# Altium PCB IGBT_half_bridge.PcbDoc
Units mil, origin at the board's own origin, x right, y up, seen from the top; angles counter-clockwise.
Board outline 3937.01 x 3543.31 mil, 2 copper layers (Top Layer, Bottom Layer), stack 61.855 mil thick; 43 components, 13 nets, 144 pads, 367 vias.
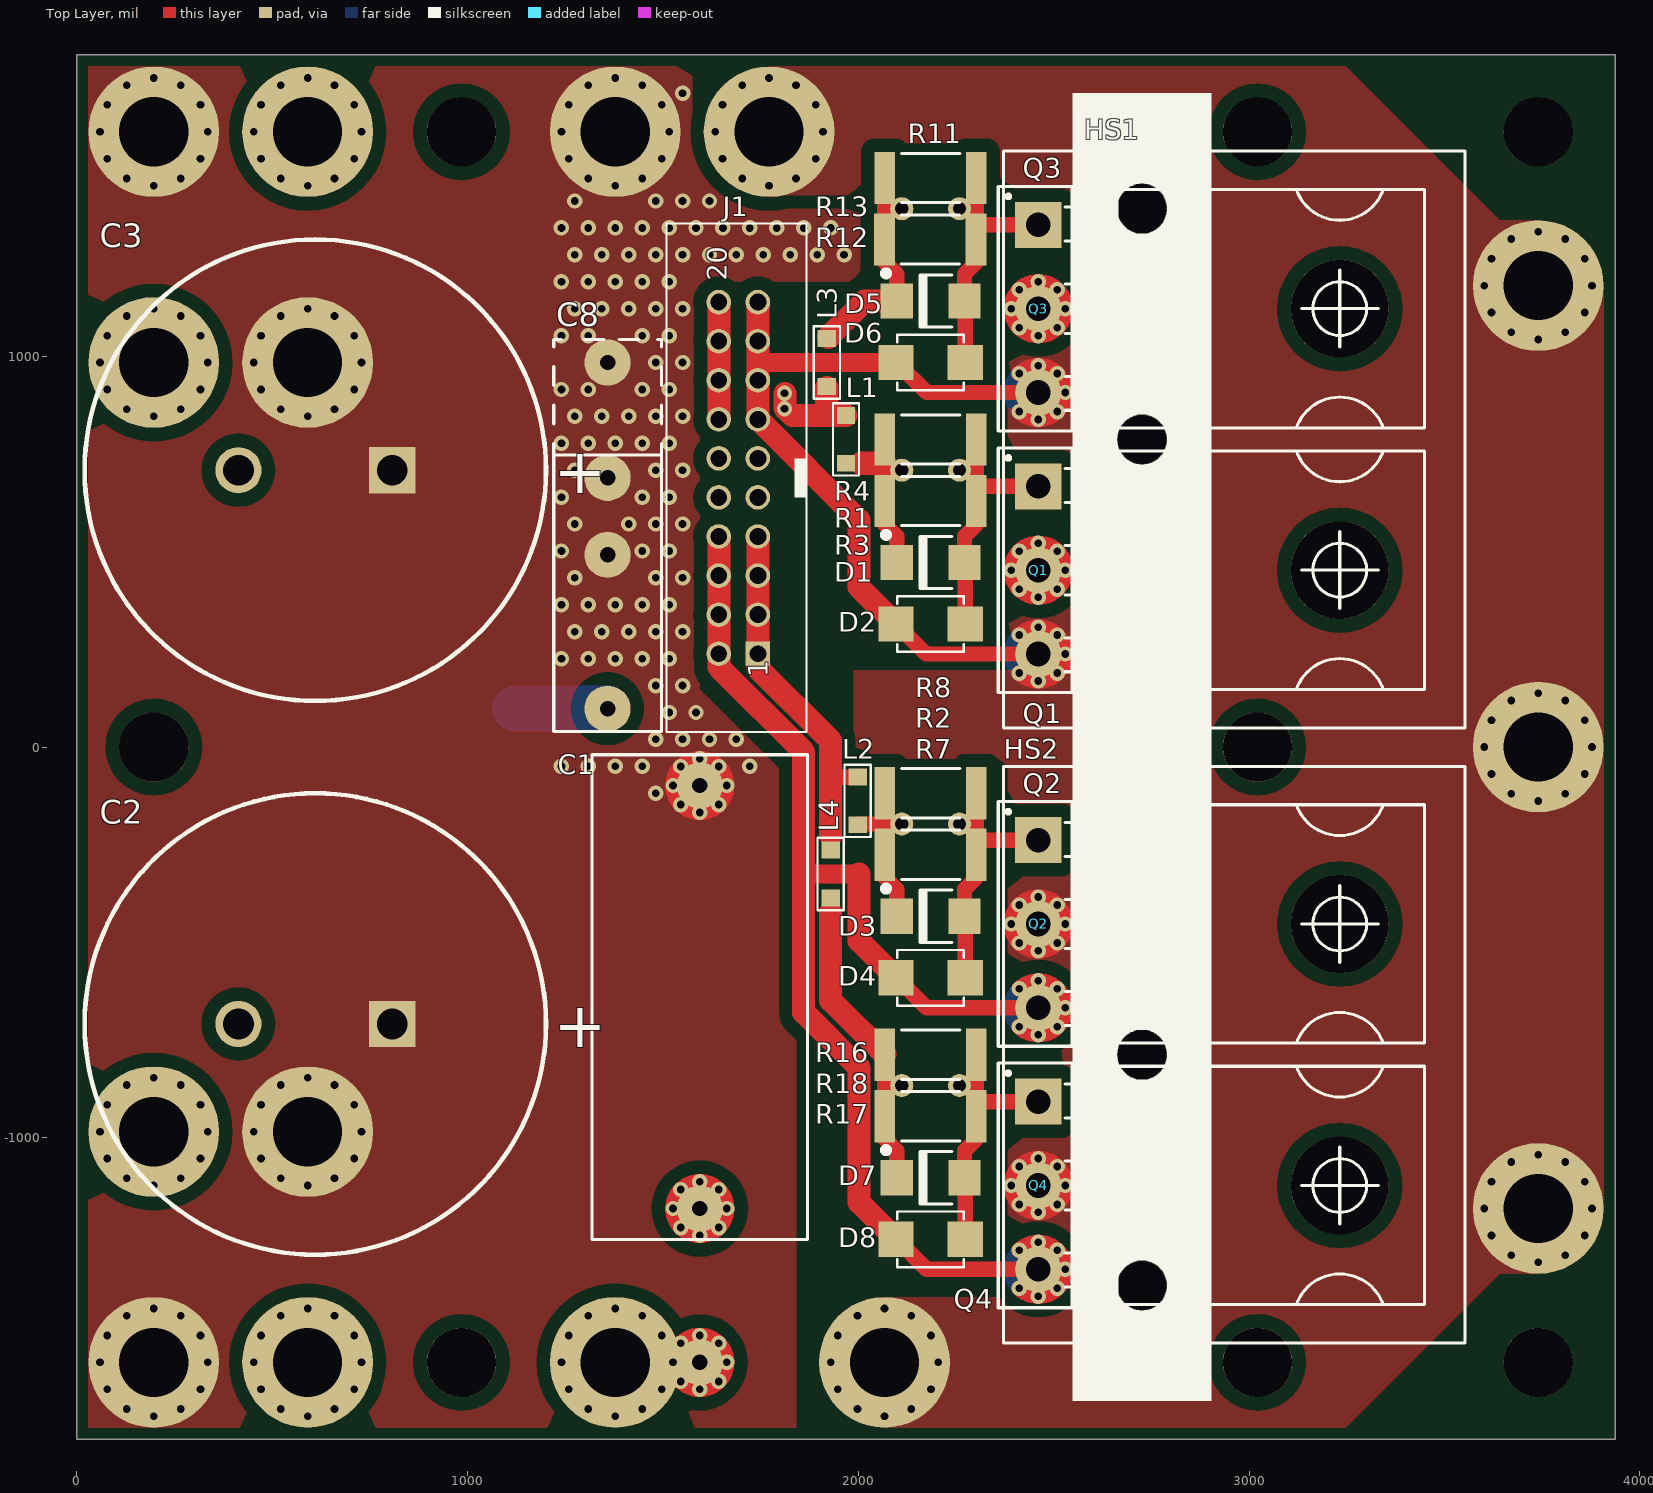
[diagram p0: Top Layer view]
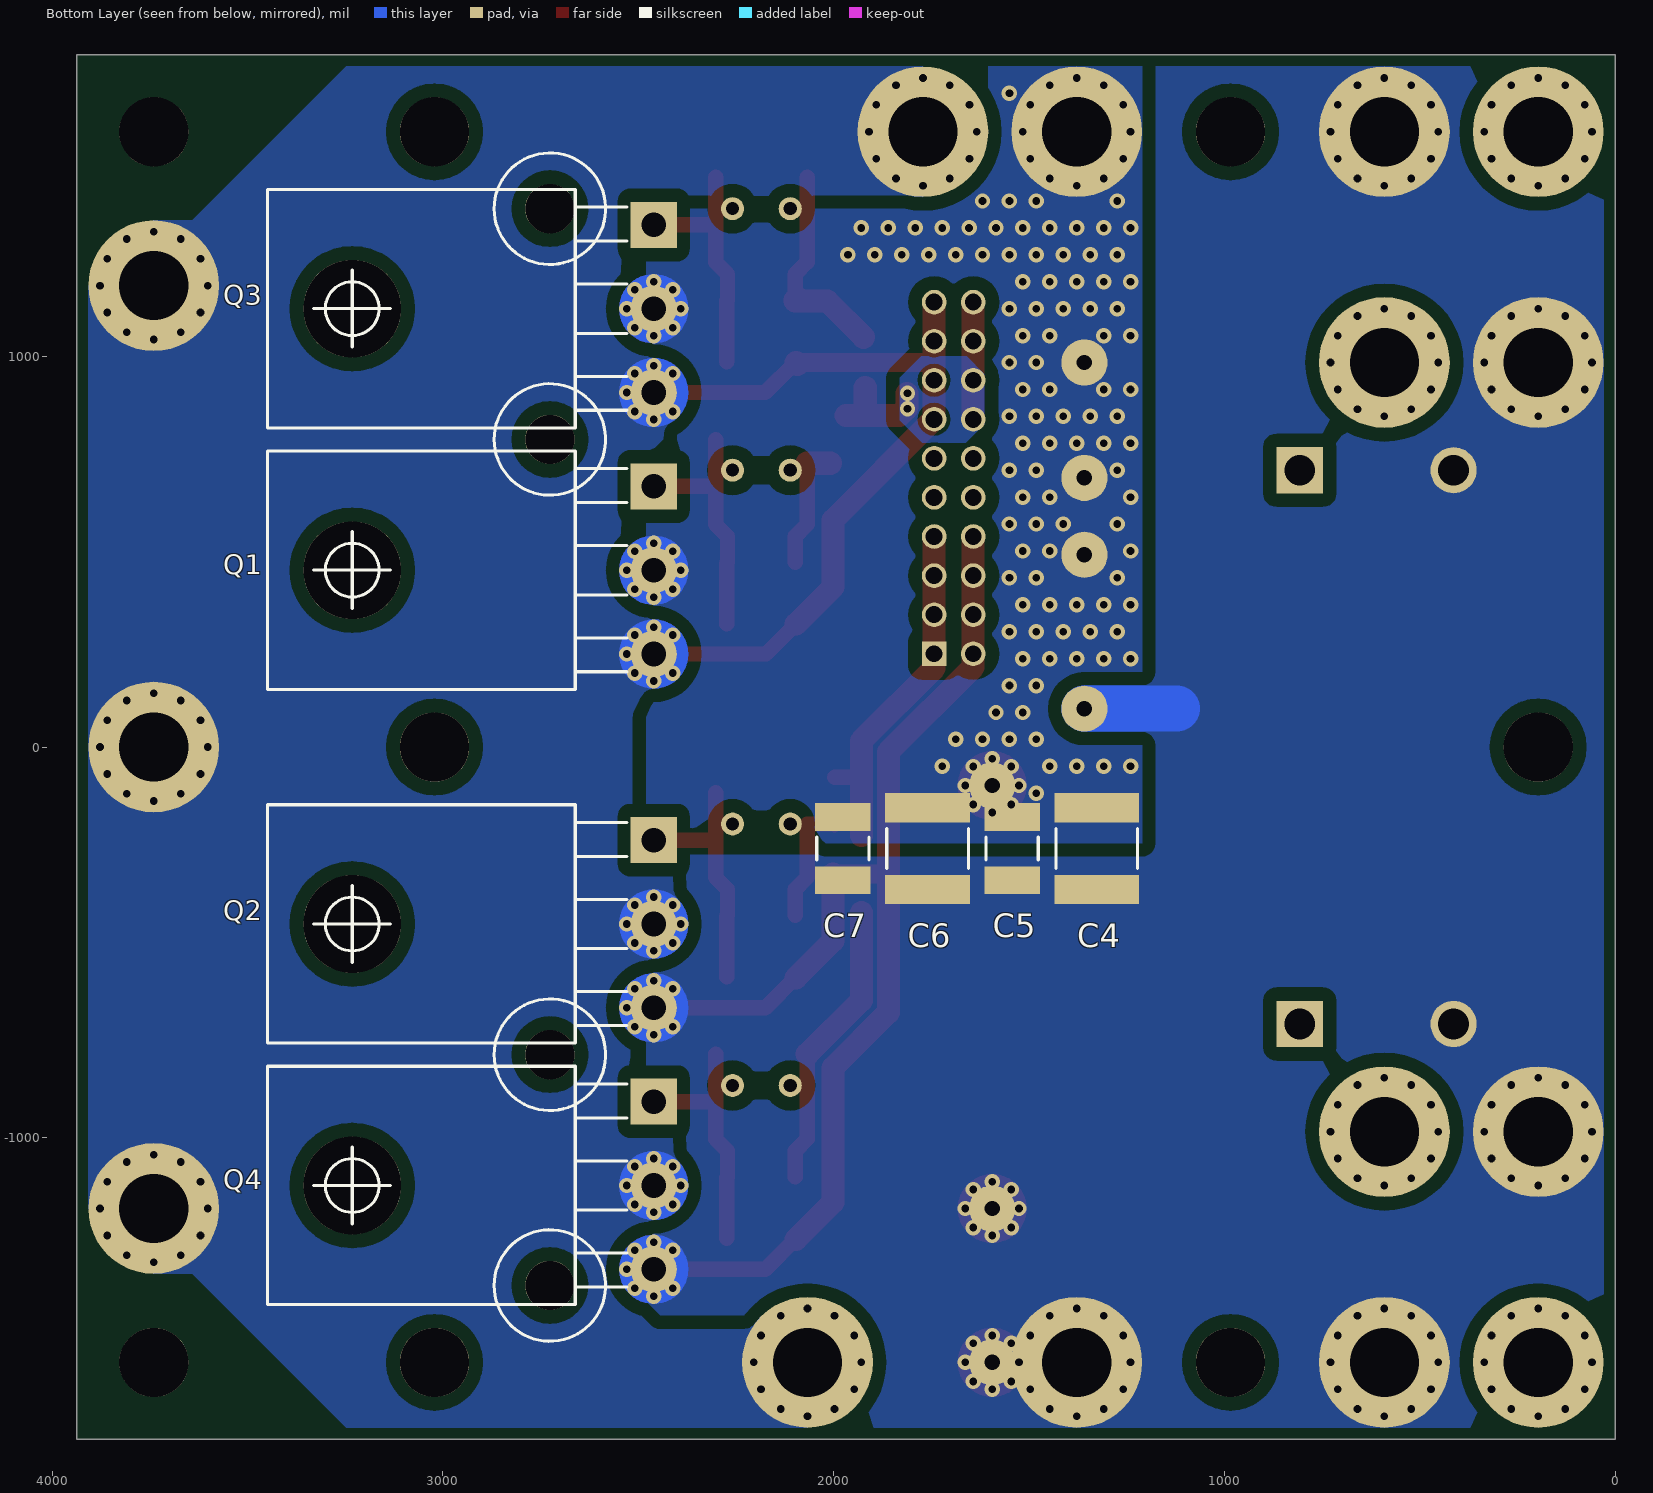
[diagram p1: Bottom Layer view, seen from below]

## Layer stack, top to bottom
Top Solder: solder mask 0.4, Solder Resist, Dk 3.5
Top Layer: signal copper 1.4
Dielectric 1: dielectric 59.0551, FR-4, Dk 4.8
Bottom Layer: signal copper 1.4
Bottom Solder: solder mask 0.4, Solder Resist, Dk 3.5

## Board outline
0,-1771.65 0,1771.65 3937.01,1771.65 3937.01,-1771.65

## Design rules (kind name [scope] priority, off if disabled: settings)
Clearance Clearance_poly [InPolygon and not InNet(High_G)] p1: gap=34.45 ignorepadtopadclearanceinfootprint=FALSE
Clearance [All] p2: gap=10 ignorepadtopadclearanceinfootprint=FALSE
ComponentClearance [All] p1 off: gap=10 collisioncheckmode=3 verticalgap=10 showdistances=FALSE
Height [All] p1 off: minheight=0 maxheight=1000 prefheight=500
HoleSize [All] p1: absolutevalues=TRUE maxlimit=250 minlimit=1 maxpercent=80.000 minpercent=20.000
PolygonConnect [All] p1: connectstyle=Direct reliefconductorwidth=10 reliefentries=4 polygonreliefangle="90 Angle" airgapwidth=10
RoutingVias [All] p1: holewidth=19.68 width=39.37 viastyle="Through Hole" minholewidth=19.68 minwidth=39.37 maxholewidth=19.68 maxwidth=39.37
SolderMaskExpansion [All] p1: expansion=4
Width [All] p1: maxlimit=393.7 minlimit=9.84 preferedwidth=19.68
27 further rules are at their usual default settings.

## Classes and differential pairs
component class IGBT_half_bridge: C1 C2 C3 C4 C5 C6 C7 C8 C41 D1 D2 D3 D4 D5 D6 D7 D8 HS1 HS2 J1 L1 L2 L3 L4 Q1 Q2 Q3 Q4 R1 R2 R3 R4 R7 R8 R11 R12 R13 R16 R17 R18

## Components (designator, comment, footprint, x,y, rotation, side; value= is the part's Value field where it differs from the comment)
C1 "B32774" "B32774 5uF 800V" 1594.49,-639.76 r270 top value="5uF 800V"
C2 "390uF" WCAP-AIG8_30x46 610.24,-708.66 r0 top
C3 "390uF" WCAP-AIG8_30x46 610.24,708.66 r0 top
C4 "Capacitor" 2220C 1326.77,-259.84 r270 bottom
C5 "Capacitor" 1812C 1543.31,-259.84 r270 bottom
C6 "Capacitor" 2220C 1759.84,-259.84 r270 bottom
C7 "Capacitor" 1812C 1976.38,-259.84 r270 bottom
C8 "Capacitor" Cap_multi_footprint 1358.27,393.7 r90 top
D1 "60V 2A" DO-214AA_(SMB-J-BEND)_UNI 2185.04,472.44 r0 top
D2 "600 W, 24 VDC" DO-214AA_Bidirectional 2185.04,314.96 r180 top
D3 "60V 2A" DO-214AA_(SMB-J-BEND)_UNI 2185.04,-433.07 r0 top
D4 "600 W, 24 VDC" DO-214AA_Bidirectional 2185.04,-590.55 r180 top
D5 "60V 2A" DO-214AA_(SMB-J-BEND)_UNI 2185.04,1141.73 r0 top
D6 "600 W, 24 VDC" DO-214AA_Bidirectional 2185.04,984.25 r180 top
D7 "60V 2A" DO-214AA_(SMB-J-BEND)_UNI 2185.04,-1102.36 r0 top
D8 "600 W, 24 VDC" DO-214AA_Bidirectional 2185.04,-1259.84 r180 top
HS1 "SK481_37.5mm HS" "SK 481 37.5" 2568.9,787.4 r270 top locked
HS2 "SK481_37.5mm HS" "SK 481 37.5_FLIP" 2568.9,-787.4 r270 top locked
J1 "61202021621" 61202021621 1692.91,688.98 r90 top
L1 "32Ω" "WE-CBF_1206_High Speed" 1968.5,787.4 r270 top value=32O
L2 "32Ω" "WE-CBF_1206_High Speed" 1998.03,-137.8 r270 top value=32O
L3 "32Ω" "WE-CBF_1206_High Speed" 1919.69,984.25 r90 top value=32O
L4 "32Ω" "WE-CBF_1206_High Speed" 1929.13,-324.8 r270 top value=32O
Q1 "" TO-247_Horizontal 2460.63,452.76 r270 top locked
Q1 "" TO-247 2460.63,452.76 r270 top locked
Q2 "" TO-247_Horizontal 2460.63,-452.76 r270 top locked
Q2 "" TO-247 2460.63,-452.76 r270 top locked
Q3 "" TO-247_Horizontal 2460.63,1122.05 r270 top locked
Q3 "" TO-247 2460.63,1122.05 r270 top locked
Q4 "" TO-247_Horizontal 2460.63,-1122.05 r270 top locked
Q4 "" TO-247 2460.63,-1122.05 r270 top locked
R1 "" RES_RADIAL_2W 2185.04,708.66 r0 top value="3R3 2W"
R2 "" RES_RADIAL_2W 2185.04,-196.85 r0 top value="3R3 2W"
R3 "Res2" RES_2512 2185.04,629.92 r0 top value="5R6 1W"
R4 "Res2" RES_2512 2185.04,787.4 r0 top value="5R6 1W"
R7 "Res2" RES_2512 2185.04,-275.59 r0 top value="5R6 1W"
R8 "Res2" RES_2512 2185.04,-118.11 r0 top value="5R6 1W"
R11 "Res2" RES_2512 2185.04,1456.69 r0 top value="5R6 1W"
R12 "Res2" RES_2512 2184.06,1299.21 r0 top value="5R6 1W"
R13 "" RES_RADIAL_2W 2185.04,1377.95 r0 top value="3R3 2W"
R16 "Res2" RES_2512 2185.04,-787.4 r0 top value="5R6 1W"
R17 "Res2" RES_2512 2185.04,-944.88 r0 top value="5R6 1W"
R18 "" RES_RADIAL_2W 2185.04,-866.14 r0 top value="3R3 2W"

## Footprints (in the part's own frame and the unit in brackets; to place one, negate y for a bottom-side part, rotate by r counter-clockwise, add the part's x,y. Pads: shape width x height; smd on the part's side, far side on the other; paste and mask are expansions set on the pad)
1812C [mm] "Chip Capacitor, 2-Leads, Body 4.50x3.20mm, IPC Low Density"
  rect 1.8x3.6 smd: 1(-2.05,0) 2(2.05,0)
  silkscreen extent -0.75,-1.7 0.75,1.7, body extent -2.4,-1.75 2.4,1.75, height 2
2220C [mm] "Chip Capacitor, 2-Leads, Body 5.70x5.00mm, IPC Low Density"
  rect 1.9x5.5 smd: 1(-2.65,0) 2(2.65,0)
  silkscreen extent -1.3,-2.65 1.3,2.65, body extent -3.05,-2.7 3.05,2.7, height 2
61202021621 [mm] "20 pins, straight, gold plating"
  rect 1.6x1.6 hole 1.1: 1(-11.43,-1.27)
  round 1.6 hole 1.1: 2(-11.43,1.27) 3(-8.89,-1.27) 4(-8.89,1.27) 5(-6.35,-1.27) 6(-6.35,1.27) 7(-3.81,-1.27) 8(-3.81,1.27) 9(-1.27,-1.27) 10(-1.27,1.27) 11(1.27,-1.27) 12(1.27,1.27) 13(3.81,-1.27) 14(3.81,1.27) 15(6.35,-1.27) 16(6.35,1.27) 17(8.89,-1.27) 18(8.89,1.27) 19(11.43,-1.27) 20(11.43,1.27)
  silkscreen extent -16.53,-4.42 16.53,4.68, body extent -16.53,-4.42 16.53,4.75, height 9.13
"B32774 5uF 800V" [mm]
  round 3 hole 1: 1(-13.75,0) 2(13.75,0)
  silkscreen extent -15.75,-7 15.75,7, body extent -15.75,-7 15.75,7, height 24.5
Cap_multi_footprint [mm] "Multiple footprint capacitor"
  round 3 hole 1: 1(-7.5,0) 1(-7.5,0) 2(2.5,0) 2(7.5,0) 2(7.5,0) 2(15,0)
  silkscreen extent -9,-3.5 16.5,3.5, body extent -9,-2.5 9,2.5, height 10.5
DO-214AA_(SMB-J-BEND)_UNI [mm] "Surface Mount Diode"
  rect 2.1x2.3 smd: A(2.2,0) K(-2.2,0)
  silkscreen extent -3.04,-1.7 1.4,1.94, body extent -2.51,-1.97 2.52,1.97, height 2.44
DO-214AA_Bidirectional [mm] "WE-TVSP Power TVS Diode, DO-214AA, Bidirectional"
  rect 2.3x2.3 smd: 1(-2.25,0) 2(2.25,0)
  silkscreen extent -2.16,-1.81 2.16,1.81, body extent -2.7,-1.81 2.7,1.81, height 2.4
RES_2512 [mm] "Chip Resistor 2512, 2-Leads, Body 6.40x3.20mm, IPC Medium Density"
  rect 1.35x3.4 smd: 1(-2.975,0) 2(2.975,0)
  silkscreen extent -1.9,-1.6 1.9,1.6, body extent -3.3,-1.7 3.3,1.7, height 0.7
RES_RADIAL_2W [mm] "2W resistor radial mount"
  round 1.5 hole 0.85: 1(-1.875,0) 2(1.875,0)
  body extent -4.38,-2.5 2.27,2.5, height 20.3
"SK 481 37.5" [mm] "Fischer SK 481 Heatsink, 37.5mm wide"
  round 3.2 hole 3.2: 1(-15,4) 2(0,4)
  silkscreen extent -18.75,-5 18.75,25, body extent -18.75,-5 18.75,25, height 45.01
"SK 481 37.5_FLIP" [mm] "Fischer SK 481 Heatsink, 37.5mm wide"
  round 3.2 hole 3.2: 1(15,4) 2(0,4)
  silkscreen extent -18.75,-5 18.75,25, body extent -18.75,-5 18.75,25, height 45.01
TO-247 [mm] "SIP with Mounting Hole; 3 Leads; Body 20 x 15.6 x 5 mm (typ); Pitch 5.45 mm"
  rect 3x3 hole 1.6: 1(-5.45,0)
  round 3 hole 1.6: 2(0,0) 3(5.45,0)
  silkscreen extent -7.95,-2.6 7.95,2.7, body extent -8,-2.2 8,2.8, height 25.55
TO-247_Horizontal [mm] "SIP with Mounting Hole; 3 Leads; Body 20 x 15.6 x 5 mm (typ); Pitch 5.45 mm"
  rect 3x3 hole 1.6: 1(-5.45,0)
  round 3 hole 1.6: 2(0,0) 3(5.45,0)
  silkscreen extent -7.75,-2.07 7.75,25.1, body extent -7.75,-0.3 7.75,25.1, height 4.9
WCAP-AIG8_30x46 [mm] "Polarized capacitors, Aluminum Electrolytic Capacitors, 2-Leads, Body 30x46x10"
  rect 3x3 hole 2: 1(5,0)
  round 3 hole 2: 2(-5,0)
  silkscreen extent -15,-15 15,15, body extent -21.2,-21.16 21.1,21.14, height 46.09
"WE-CBF_1206_High Speed" [mm] "SMD EMI Suppression Ferrite  Bead, body 3.2mmx1.6mm"
  rect 1.1x1.2 smd: 1(-1.55,0) 2(1.55,0)
  silkscreen extent -2.35,-0.85 2.35,0.85, body extent -1.6,-0.8 1.6,0.8, height 1.13

## Part data
C1: library part Cap, "Capacitor", LatestRevisionDate=17-Jul-2002, LatestRevisionNote="Re-released for DXP Platform.", PackageDescription="Radial Cap, Thru-Hole; 2 Leads; 0.3 in Pin Spacing", PackageReference=RAD-0.3, Published=8-Jun-2000, Publisher="Altium Limited"
C2 C3: library part "WCAP-AIG8, 861011485019", "WCAP-AIG8 Aluminum Electrolytic Capacitors, 390uF", PartNumber=861011485019, RatedVoltage=450V, ComponentLink1Description=Manufacturer, ComponentLink1URL=http://www.we-online.de, ComponentLink2Description=Datasheet, ComponentLink2URL=http://katalog.we-online.de/pbs/datasheet/861011485019.pdf, PublishedDate="July 2016", Publisher="Wurth Elektronik", Size=30mmx46mm
C4 C6: Capacitance=0.22u, package=2220, voltage=630V
C5 C7: Capacitance=0.1u, package=1812, voltage=1kV
C8: Capacitance=0.1u, voltage=630V
D1 D3 D5 D7: library part SS26, "SS26 Schottky rectifier"
D2 D4 D6 D8: library part "WE-TVSP DO-214AA, 824521241", "WE-TVSP Power TVS Diode, bidirectional, 600 W, 24 VDC", Manufacturer="Wurth Elektronik", partNo=824521241, ComponentLink1Description=Manufacturer, ComponentLink1URL=http://www.we-online.de, ComponentLink2Description=Datasheet, ComponentLink2URL=http://katalog.we-online.de/pbs/datasheet/824521241.pdf, Created by="Baojun Chen", Created Date=Nov.2015
HS1 HS2: library part SK_481_37.5
J1: "WR-BHD 2.54mm Male Box Header", Manufacturer="Wurth Elektronik", ComponentLink1 Description=Manufacturer, ComponentLink1URL=http://www.we-online.com, ComponentLink2 Description=Datasheet, ComponentLink2URL=http://katalog.we-online.de/em/datasheet/6120xx21621.pdf, Created by="Baojun Chen", Created Date="March 2016", NoPins=20, partNo=61202021621
L1 L2 L3 L4: library part "WE-CBF, 7427921", "WE-CBF SMD EMI Suppression Ferrite Bead, 1206, 32O", PartNumber=7427921, ComponentLink1Description=Manufacturer, ComponentLink1URL=http://www.we-online.de, ComponentLink2Description=Datasheet, ComponentLink2URL=http://katalog.we-online.de/pbs/datasheet/7427921.pdf, PublishedDate="Aug 2016", Publisher="Wurth Elektronik", Size=1206, Type="High Speed"
Q1 Q2 Q3 Q4: library part TO-247_IGBT_H, "IGBT, TO-247, Horizontal"
Q1 Q2 Q3 Q4: library part TO-247_IGBT_V, "IGBT, TO-247, Vertical"
R1 R2 R13 R18: library part Res2, "Resistor", LatestRevisionDate=17-Jul-2002, LatestRevisionNote="Re-released for DXP Platform.", PackageDescription="Axial Device, Thru-Hole; 2 Leads; 0.4 in Pin Spacing", PackageReference=AXIAL-0.4, Published=8-Jun-2000, Publisher="Altium Limited"
R3 R4 R7 R8 R11 R12 R16 R17: "Resistor", LatestRevisionDate=17-Jul-2002, LatestRevisionNote="Re-released for DXP Platform.", PackageDescription="Axial Device, Thru-Hole; 2 Leads; 0.4 in Pin Spacing", PackageReference=AXIAL-0.4, Published=8-Jun-2000, Publisher="Altium Limited"

## Free pads (board coordinates)
  round 334.65 hole 177.17: 0(196.85,-1574.8) 0(196.85,-984.25) 0(196.85,984.25) 0(196.85,1574.8) 0(590.55,-1574.8) 0(590.55,-984.25) 0(590.55,984.25) 0(590.55,1574.8) 0(1377.95,-1574.8) 0(1377.95,1574.8) 0(1771.65,1574.8) 0(2066.93,-1574.8) 0(3740.16,-1181.1) 0(3740.16,0) 0(3740.16,1181.1)
  round 177.17 hole 177.17: 0(196.85,0) 0(984.25,-1574.8) 0(984.25,1574.8) 0(3021.65,-1574.8) 0(3021.65,0) 0(3021.65,1574.8) 0(3740.16,-1574.8) 0(3740.16,1574.8)
  round 250 hole 250: 0(3232.28,-1122.05) 0(3232.28,-452.76) 0(3232.28,452.76) 0(3232.28,1122.05)
  round 118.11 hole 39.37: 1(1594.49,-1574.8)

## Via types
v1: diameter 39.37, hole 19.68, Top Layer to Bottom Layer, tented both sides, 367 vias

## Nets (pads, with @x,y where several pads share a name; then routed paths per layer and width w, separated by ;. In a path a pad name is that pad's centre, name@x,y a point inside that pad or via, vN(x,y) a via of type N, cw(c..) or ccw(c..) an arc to the next point about the centre after c; other vN are vias at no path point)
E1C2: D2.2 D6.2 J1.13 J1.15 J1.17 J1.19 pad.0@1771.65,1574.8 pad.0@2066.93,-1574.8 pad.0@3740.16,0 pad.0@3740.16,1181.1 pad.0@3740.16,-1181.1 Q1.3 Q2.2 Q3.3 Q4.2 | length 6668.6
  Top Layer w39.37: D2.2 2173.23,238.19 Q1.3@2460.63,238.19 ; D6.2@2096.46,986.22 2175.2,907.48 Q3.3@2460.63,907.48 ; v1(2411.91,189.47) ccw(c2460.63,238.19) v1(2411.91,286.91) ; v1(2411.91,858.76) ccw(c2460.63,907.48) v1(2411.91,956.2) ; v1(2509.35,-501.47) cw(c2460.63,-452.76) v1(2509.35,-404.04) ; v1(2529.53,-1122.05) ccw(c2460.63,-1122.05) v1(2529.53,-1122.05) ; v1(2529.53,-452.76) ccw(c2460.63,-452.76) v1(2529.53,-452.76)
  Top Layer w49.21: 1742.91,984.25 D6.2
  Top Layer w59.06: J1.19 J1.17 1742.91,984.25 J1.15 J1.13 1743.36,838.98 2001.81,580.52 2001.81,409.61 D2.2 ; D6.2@2092.13,979.92 D6.2
  Bottom Layer w39.37: v1(2411.91,189.47) ccw(c2460.63,238.19) v1(2529.53,238.19) ; v1(2411.91,286.91) cw(c2460.63,238.19) v1(2529.53,238.19) ; v1(2411.91,858.76) ccw(c2460.63,907.48) v1(2411.91,956.2) ; v1(2509.35,-1170.77) cw(c2460.63,-1122.05) v1(2509.35,-1073.33) ; v1(2529.53,238.19) ccw(c2460.63,238.19) v1(2529.53,238.19) ; v1(2529.53,-1122.05) ccw(c2460.63,-1122.05) v1(2529.53,-1122.05) ; v1(2529.53,-452.76) ccw(c2460.63,-452.76) v1(2529.53,-452.76) ; v1(2529.53,907.48) ccw(c2460.63,907.48) v1(2529.53,907.48)
  other v1: 2066.93,-1712.6 1998.03,-1694.14 2135.83,-1694.14 1947.59,-1643.7 2186.26,-1643.7 1929.13,-1574.8 2204.72,-1574.8 1947.59,-1505.91 2186.26,-1505.91 1998.03,-1455.47 2135.83,-1455.47 2066.93,-1437.01 3740.16,-1318.9 3671.26,-1300.44 3809.06,-1300.44 3620.82,-1250 3859.49,-1250 2460.63,-1190.94 3602.36,-1181.1 3877.95,-1181.1 2411.91,-1170.77 2391.73,-1122.05 3620.82,-1112.2 3859.49,-1112.2 2411.91,-1073.33 3671.26,-1061.77 3809.06,-1061.77 2460.63,-1053.15 3740.16,-1043.31 2460.63,-521.65 2411.91,-501.47 2391.73,-452.76 2411.91,-404.04 2460.63,-383.86 3740.16,-137.8 3671.26,-119.33 3809.06,-119.33 3620.82,-68.9 3859.49,-68.9 3602.36,0 3877.95,0 3620.82,68.9 3859.49,68.9 3671.26,119.33 3809.06,119.33 3740.16,137.8 2460.63,169.29 2509.35,189.47 2509.35,286.91 2460.63,307.09 2460.63,838.58 2509.35,858.76 2509.35,956.2 2460.63,976.38 3740.16,1043.31 3671.26,1061.77 3809.06,1061.77 3620.82,1112.2 3859.49,1112.2 3602.36,1181.1 3877.95,1181.1 3620.82,1250 3859.49,1250 3671.26,1300.44 3809.06,1300.44 3740.16,1318.9 1771.65,1437.01 1702.76,1455.47 1840.55,1455.47 1652.32,1505.91 1890.99,1505.91 1633.86,1574.8 1909.45,1574.8 1652.32,1643.7 1890.99,1643.7 1702.76,1694.14 1840.55,1694.14 1771.65,1712.6
HIGH_G: J1.14 J1.16 J1.18 J1.20 L1.1 L3.1 | length 574.2
  Top Layer w59.06: J1.14 J1.16 J1.18 J1.20 ; v1@1811.97,905.51 1811.97,870.36 1813.94,868.4 1813.94,866.05 1831.57,848.43 1919.29,848.43 ; L3.1@1919.69,920.12 1919.29,920.12 1919.29,848.43 ; L1.1 1919.29,848.43
  other v1: 1811.02,866.14 1811.02,905.51
LOW_G: J1.1 J1.3 J1.5 J1.7 L2.1 L4.1 | length 890.2
  Top Layer w39.37: 1929.13,-76.77 L2.1
  Top Layer w59.06: J1.1@1742.91,217.74 1742.91,202.31 1929.13,16.09 1929.13,-76.77 1929.13,-226.38 ; J1.1 J1.3 J1.5 J1.7
NetD1_A: D1.A D2.1 Q1.1 R1.2 R3.2 R4.2 | length 645.2
  Top Layer w39.37: D2.1 2273.62,470.47 D1.A 2271.65,539.37 2302.17,569.88 R3.2 R3.2@2302.17,669.29 ; R4.2 R3.2@2302.17,669.29 ; Q1.1@2460.63,667.32 2304.13,667.32 R3.2@2302.17,669.29
NetD1_K: D1.K L1.2 R1.1 R3.1 R4.1 | length 326.6
  Top Layer w39.37: R4.1@2067.91,726.38 R3.1 2067.91,569.88 2098.43,539.37 D1.K
  Top Layer w59.06: 2007.87,726.38 R4.1@2067.91,726.38
NetD3_A: D3.A D4.1 Q2.1 R2.2 R7.2 R8.2 | length 644.4
  Top Layer w39.37: D4.1@2273.62,-588.58 2273.62,-433.07 2271.65,-431.1 2271.65,-364.17 2302.17,-333.66 R7.2@2302.17,-238.19 ; R8.2@2302.17,-116.14 R7.2@2302.17,-238.19 ; Q2.1@2460.63,-238.19 R7.2@2302.17,-238.19
NetD3_K: D3.K L2.2 R2.1 R7.1 R8.1 | length 317.6
  Top Layer w39.37: L2.2 2000,-196.85 2067.91,-196.85 2067.91,-333.66 2098.43,-364.17 D3.K@2098.43,-431.1
NetD5_A: D5.A D6.1 Q3.1 R11.2 R12.2 R13.2 | length 644.4
  Top Layer w39.37: D6.1@2273.62,986.22 2273.62,1141.73 2271.65,1143.7 2271.65,1210.63 2302.17,1241.14 R12.2@2302.17,1336.61 ; R11.2@2302.17,1458.66 R12.2@2302.17,1336.61 ; Q3.1@2460.63,1336.61 R12.2@2302.17,1336.61
NetD5_K: D5.K L3.2 R11.1 R12.1 R13.1 | length 548.4
  Top Layer w39.37: R11.1@2067.91,1458.66 2067.91,1241.14 2098.43,1210.63 D5.K@2098.43,1143.7
  Top Layer w59.06: L3.2@1923.43,1049.02 2016.14,1141.73 D5.K ; D5.K@2093.18,1148.94 D5.K@2098.43,1143.7
NetD7_A: D7.A D8.1 Q4.1 R16.2 R17.2 R18.2 | length 644.4
  Top Layer w39.37: D8.1@2273.62,-1257.87 2273.62,-1102.36 2271.65,-1100.39 2271.65,-1033.46 2302.17,-1002.95 R17.2@2302.17,-907.48 ; R16.2@2302.17,-785.43 R17.2@2302.17,-907.48 ; Q4.1@2460.63,-907.48 R17.2@2302.17,-907.48
NetD7_K: D7.K L4.2 R16.1 R17.1 R18.1 | length 748.4
  Top Layer w39.37: R16.1@2067.91,-785.43 2067.91,-1002.95 2098.43,-1033.46 D7.K@2098.43,-1100.39
  Top Layer w59.06: 1929.13,-423.23 1929.13,-648.62 2065.95,-785.43 R16.1@2067.91,-785.43
VBus+: C1.1 C2.1 C3.1 C4.1 C5.1 C6.1 C7.1 C8.2 pad.0@196.85,1574.8 pad.0@196.85,-1574.8 pad.0@590.55,984.25 pad.0@590.55,-984.25 pad.0@1377.95,1574.8 Q1.2 Q3.2 | length 2489.2
  Top Layer w39.37: v1(2509.35,1073.33) cw(c2460.63,1122.05) v1(2509.35,1170.77) ; v1(1663.39,-98.43) ccw(c1594.49,-98.43) v1(1663.39,-98.43) ; v1(2529.53,452.76) ccw(c2460.63,452.76) v1(2529.53,452.76) ; v1(2529.53,1122.05) ccw(c2460.63,1122.05) v1(2529.53,1122.05)
  Bottom Layer w39.37: v1(2529.53,452.76) ccw(c2460.63,452.76) v1(2529.53,452.76) ; v1(2529.53,1122.05) ccw(c2460.63,1122.05) v1(2529.53,1122.05)
  other v1: 196.85,-1712.6 127.95,-1694.14 265.75,-1694.14 77.52,-1643.7 316.18,-1643.7 59.05,-1574.8 334.65,-1574.8 77.52,-1505.91 316.18,-1505.91 127.95,-1455.47 265.75,-1455.47 196.85,-1437.01 590.55,-1122.05 521.65,-1103.59 659.45,-1103.59 471.22,-1053.15 709.89,-1053.15 452.76,-984.25 728.35,-984.25 471.22,-915.35 709.89,-915.35 521.65,-864.92 659.45,-864.92 590.55,-846.46 1594.49,-167.32 1545.77,-147.14 1643.21,-147.14 1481.3,-118.11 1525.59,-98.43 1545.77,-49.71 1643.21,-49.71 1240.15,-49.22 1309.05,-49.22 1377.95,-49.22 1446.85,-49.22 1722.44,-49.22 1594.49,-29.53 1481.3,19.68 1550.19,19.68 1619.09,19.68 1687.99,19.68 1515.75,88.58 1584.64,88.58 1481.3,157.48 1550.19,157.48 1240.15,226.37 1309.05,226.37 1377.95,226.37 1446.85,226.37 1515.75,226.37 1274.6,295.27 1343.5,295.27 1412.4,295.27 1481.3,295.27 1550.19,295.27 1240.15,364.17 1309.05,364.17 1377.95,364.17 1446.85,364.17 1515.75,364.17 2460.63,383.86 2411.91,404.04 2509.35,404.04 1274.6,433.07 1481.3,433.07 1550.19,433.07 2391.73,452.76 2411.91,501.47 2509.35,501.47 1240.15,501.96 1446.85,501.96 1515.75,501.96 2460.63,521.65 1274.6,570.86 1412.4,570.86 1481.3,570.86 1550.19,570.86 1240.15,639.76 1446.85,639.76 1515.75,639.76 1274.6,708.66 1481.3,708.66 1550.19,708.66 1240.15,777.56 1309.05,777.56 1377.95,777.56 1446.85,777.56 1515.75,777.56 590.55,846.46 1274.6,846.45 1343.5,846.45 1412.4,846.45 1481.3,846.45 1550.19,846.45 521.65,864.92 659.45,864.92 471.22,915.35 709.89,915.35 1240.15,915.35 1309.05,915.35 1446.85,915.35 1515.75,915.35 452.76,984.25 728.35,984.25 1481.3,984.25 1550.19,984.25 471.22,1053.15 709.89,1053.15 1240.15,1053.15 1309.05,1053.15 1446.85,1053.15 1515.75,1053.15 2460.63,1053.15 2411.91,1073.33 521.65,1103.59 659.45,1103.59 590.55,1122.05 1274.6,1122.04 1343.5,1122.04 1412.4,1122.04 1481.3,1122.04 1550.19,1122.04 2391.73,1122.05 2411.91,1170.77 1240.15,1190.94 1309.05,1190.94 1377.95,1190.94 1446.85,1190.94 1515.75,1190.94 2460.63,1190.94 1274.6,1259.84 1343.5,1259.84 1412.4,1259.84 1481.3,1259.84 1550.19,1259.84 1619.09,1259.84 1687.99,1259.84 1756.89,1259.84 1825.78,1259.84 1894.68,1259.84 1963.58,1259.84 1240.15,1328.74 1309.05,1328.74 1377.95,1328.74 1446.85,1328.74 1515.75,1328.74 1584.64,1328.74 1653.54,1328.74 1722.44,1328.74 1791.34,1328.74 1860.23,1328.74 1929.13,1328.74 1274.6,1397.63 1481.3,1397.63 1550.19,1397.63 1619.09,1397.63 196.85,1437.01 1377.95,1437.01 127.95,1455.47 265.75,1455.47 1309.06,1455.47 1446.85,1455.47 77.52,1505.91 316.18,1505.91 1258.62,1505.91 1497.29,1505.91 59.06,1574.8 334.65,1574.8 1240.16,1574.8 1515.75,1574.8 77.52,1643.7 316.18,1643.7 1258.62,1643.7 1497.29,1643.7 1550.19,1673.22 127.95,1694.14 265.75,1694.14 1309.06,1694.14 1446.85,1694.14 196.85,1712.6 1377.95,1712.6
VBus-: C1.2 C2.2 C3.2 C4.2 C5.2 C6.2 C7.2 C8.1 D4.2 D8.2 J1.2 J1.4 J1.6 J1.8 pad.0@196.85,984.25 pad.0@196.85,-984.25 pad.0@590.55,1574.8 pad.0@590.55,-1574.8 pad.0@1377.95,-1574.8 pad.1 Q2.3 Q4.3 | length 6491.4
  Top Layer w39.37: D8.2@2096.46,-1257.87 2175.2,-1336.61 Q4.3@2460.63,-1336.61 ; D4.2@2096.46,-588.58 2175.2,-667.32 Q2.3@2460.63,-667.32 ; v1(2411.91,-1385.33) ccw(c2460.63,-1336.61) v1(2411.91,-1287.9) ; v1(2411.91,-716.04) ccw(c2460.63,-667.32) v1(2411.91,-618.6) ; v1(1663.39,-1574.8) ccw(c1594.49,-1574.8) v1(1663.39,-1574.8) ; v1(1663.39,-1181.1) ccw(c1594.49,-1181.1) v1(1663.39,-1181.1)
  Top Layer w49.21: 1862.08,-324.8 2001.81,-324.8
  Top Layer w59.06: J1.8 J1.6 J1.4 J1.2 1642.91,204.65 1860.08,-12.51 1860.08,-678.98 2001.81,-820.71 2001.81,-1165.2 D8.2 ; 2001.81,-324.8 2001.81,-495.91 D4.2
  Bottom Layer w39.37: v1(2411.91,-1385.33) ccw(c2460.63,-1336.61) v1(2411.91,-1287.9) ; v1(2411.91,-716.04) ccw(c2460.63,-667.32) v1(2411.91,-618.6) ; v1(2529.53,-1336.61) ccw(c2460.63,-1336.61) v1(2529.53,-1336.61) ; v1(2529.53,-667.32) ccw(c2460.63,-667.32) v1(2529.53,-667.32)
  Bottom Layer w118.11: 1122.05,98.43 C8.1@1358.27,98.43
  other v1: 590.55,-1712.6 1377.95,-1712.6 521.65,-1694.14 659.45,-1694.14 1309.06,-1694.14 1446.85,-1694.14 471.22,-1643.7 709.89,-1643.7 1258.62,-1643.7 1497.29,-1643.7 1594.49,-1643.7 1545.77,-1623.52 1643.21,-1623.52 452.76,-1574.8 728.35,-1574.8 1240.16,-1574.8 1525.59,-1574.8 1545.77,-1526.09 1643.21,-1526.09 471.22,-1505.91 709.89,-1505.91 1258.62,-1505.91 1497.29,-1505.91 1594.49,-1505.91 521.65,-1455.47 659.45,-1455.47 1309.06,-1455.47 1446.85,-1455.47 590.55,-1437.01 1377.95,-1437.01 2460.63,-1405.51 2509.35,-1385.33 2509.35,-1287.9 2460.63,-1267.72 1594.49,-1250 1545.77,-1229.82 1643.21,-1229.82 1525.59,-1181.1 1545.77,-1132.38 1643.21,-1132.38 196.85,-1122.05 1594.49,-1112.2 127.95,-1103.59 265.75,-1103.59 77.52,-1053.15 316.18,-1053.15 59.05,-984.25 334.65,-984.25 77.52,-915.35 316.18,-915.35 127.95,-864.92 265.75,-864.92 196.85,-846.46 2460.63,-736.22 2509.35,-716.04 2509.35,-618.6 2460.63,-598.43 196.85,846.46 127.95,864.92 265.75,864.92 77.52,915.35 316.18,915.35 59.06,984.25 334.65,984.25 77.52,1053.15 316.18,1053.15 127.95,1103.59 265.75,1103.59 196.85,1122.05 590.55,1437.01 521.65,1455.47 659.45,1455.47 471.22,1505.91 709.89,1505.91 452.76,1574.8 728.35,1574.8 471.22,1643.7 709.89,1643.7 521.65,1694.14 659.45,1694.14 590.55,1712.6
pads on no net: HS1.1 HS1.2 HS2.1 HS2.2 J1.9 J1.10 J1.11 J1.12

## Polygon pours and split planes (outlines as drawn)
VBus- on Bottom Layer "VBUS-_L02_P006" (solid, pour order 6): 1496.06,-1742.13 29.53,-1742.13 29.53,1742.13 1496.06,1742.13
HIGH_G on Bottom Layer "HIGH_G_L02_P000" (solid, pour order 0): 1614.17,826.77 1661.42,779.53 1773.62,779.53 1830.71,836.61 1830.71,944.88 1775.59,1000 1659.45,1000 1614.17,954.72
VBus- on Bottom Layer "VBUS-_L02_P004" (solid, pour order 4): 2480.31,-1418.3 2443.9,-1454.71 2005.89,-1454.71 1919.29,-1541.31 1919.29,-1742.13 1299.21,-1742.13 1299.21,-275.59 2480.31,-275.59
VBus+ on Bottom Layer "VBUS+_L02_P002" (solid, pour order 2): 1604.5,1742.13 1604.67,1544.94 1771.65,1377.95 2480.31,1377.95 2480.32,295.28 2480.32,-246.06 1210.63,-246.06 1210.63,1742.13
E1C2 on Bottom Layer "E1C2_L02_P008" (solid, pour order 8): 3740.16,-1348.43 3907.48,-1181.1 3907.48,1181.1 3740.16,1348.43 3641.73,1348.43 3248.03,1742.13 1771.65,1742.13 1604.33,1574.8 1771.65,1407.48 2352.36,1407.48 2381.89,1377.95 2381.89,1230.31 2381.89,-1338.58 2263.78,-1456.69 2066.93,-1456.69 2066.93,-1742.13 3248.03,-1742.13 3641.73,-1348.43
VBus+ on Top Layer "VBUS+_L01_P005" (solid, pour order 5): 1574.8,1742.13 1574.8,1574.8 1771.65,1377.95 2017.72,1377.95 2017.72,1190.94 1633.86,1190.94 1594.49,1151.57 1594.49,-295.28 1840.55,-295.28 1840.55,-1742.13 1545.28,-1742.13 29.53,-1742.13 29.53,1742.13 1545.28,1742.13
E1C2 on Top Layer "E1C2_L01_P007" (solid, pour order 7): 3740.16,1348.43 3907.48,1181.1 3907.48,-1174.09 3907.48,-1181.1 3740.16,-1348.43 3641.73,-1348.43 3248.03,-1742.13 2066.93,-1742.13 1899.61,-1574.8 2066.93,-1407.48 2381.89,-1407.48 2381.89,-48.1 2380.78,-49.21 1988.19,-49.21 1988.19,196.85 2381.89,196.85 2381.89,1348.42 2322.83,1407.48 1771.65,1407.48 1604.33,1574.8 1771.65,1742.13 3248.03,1742.13 3641.73,1348.43
VBus+ on Top Layer "VBUS+_L01_P003" (solid, remove dead copper, pour order 3): 1840.55,-984.25 1742.13,-1082.68 1299.21,-1082.68 1299.21,1624.02 1545.28,1624.02 1545.28,196.85 1840.55,-98.43
no net on Top Overlay "HS_Insulation" (solid): 2549.21,1673.23 2549.21,-1673.23 2903.54,-1673.23 2903.54,1673.23

## Other copper
Top Layer:
  pour cut-out: 2352.36,866.14 2421.26,866.14 2421.26,944.88 2352.36,944.88 2352.36,1545.28 2027.56,1545.28 2027.56,1190.94 1616.36,1190.94 1594.49,1171.26 1594.49,187.01 1811.02,-29.53 1811.02,-698.82 1948.82,-836.61 1948.82,-1190.94 2027.56,-1269.68 2027.56,-1328.74 2106.3,-1328.74 2155.51,-1377.95 2421.26,-1377.95 2421.26,-1299.21 2352.36,-1299.21 2352.36,-708.66 2421.26,-708.66 2421.26,-629.92 2352.36,-629.92 2352.36,-29.53 1988.19,-29.53 1988.19,196.85 2421.26,196.85 2421.26,275.59 2352.36,275.59

## Silkscreen, mask and mechanical layers (free items; w line width, h text height)
Top Overlay:
  circle w10: c2726.38,1377.95 r68.9
  circle w10: c2726.38,787.4 r68.9
  circle w10: c2726.38,-787.4 r68.9
  circle w10: c2726.38,-1377.95 r68.9
  pour cut-out: 2657.48,1377.95 ccw(c2726.38,1377.95) 2726.38,1309.06 ccw(c2726.38,1377.95) 2795.28,1377.95 ccw(c2726.38,1377.95) 2726.38,1446.85 ccw(c2726.38,1377.95)
  pour cut-out: 2657.48,787.4 ccw(c2726.38,787.4) 2726.38,718.5 ccw(c2726.38,787.4) 2795.28,787.4 ccw(c2726.38,787.4) 2726.38,856.3 ccw(c2726.38,787.4)
  pour cut-out: 2657.48,-787.4 ccw(c2726.38,-787.4) 2726.38,-856.3 ccw(c2726.38,-787.4) 2795.28,-787.4 ccw(c2726.38,-787.4) 2726.38,-718.5 ccw(c2726.38,-787.4)
  pour cut-out: 2657.48,-1377.95 ccw(c2726.38,-1377.95) 2726.38,-1446.85 ccw(c2726.38,-1377.95) 2795.28,-1377.95 ccw(c2726.38,-1377.95) 2726.38,-1309.06 ccw(c2726.38,-1377.95)
Board Outline:
  the board outline again, w7.87

## Dimensions
3740.16,1181.1 to 3937.01,1771.65 on Mechanical 1
2066.93,-1574.8 to 3937.01,-1771.65 on Mechanical 1
196.85,984.25 to 196.85,1574.8 on Mechanical 1
196.85,1574.8 to 590.55,1574.8 on Mechanical 1
3937.01,1771.65 to 1771.65,1574.8 on Mechanical 1
3021.65,1574.8 to 3740.16,1574.8 on Mechanical 1
0,1771.65 to 196.85,1574.8 on Mechanical 1
3937.01,-1771.65 to 0,-1771.65 on Mechanical 1
3937.01,-1771.65 to 3937.01,1771.65 on Mechanical 1

## Text inside footprints (layer, text, board x,y; h text height)
C2: Top Overlay "+" at 1220.47,-767.72 h118.11
C3: Top Overlay "+" at 1220.47,649.61 h118.11
J1: Top Overlay "1" at 1767.91,178.98 h50 r90; Top Overlay "20" at 1662.91,1193.98 h50 r90